# Altium PCB 百味勺子.PcbDoc
Units mil, origin at the board's own origin, x right, y up, seen from the top; angles counter-clockwise.
Board outline 876.26 x 2923.5 mil, 2 copper layers (Top Layer, Bottom Layer); 62 components, 36 nets, 174 pads, 22 vias.
Unrouted connection lines stored in the file: 44.
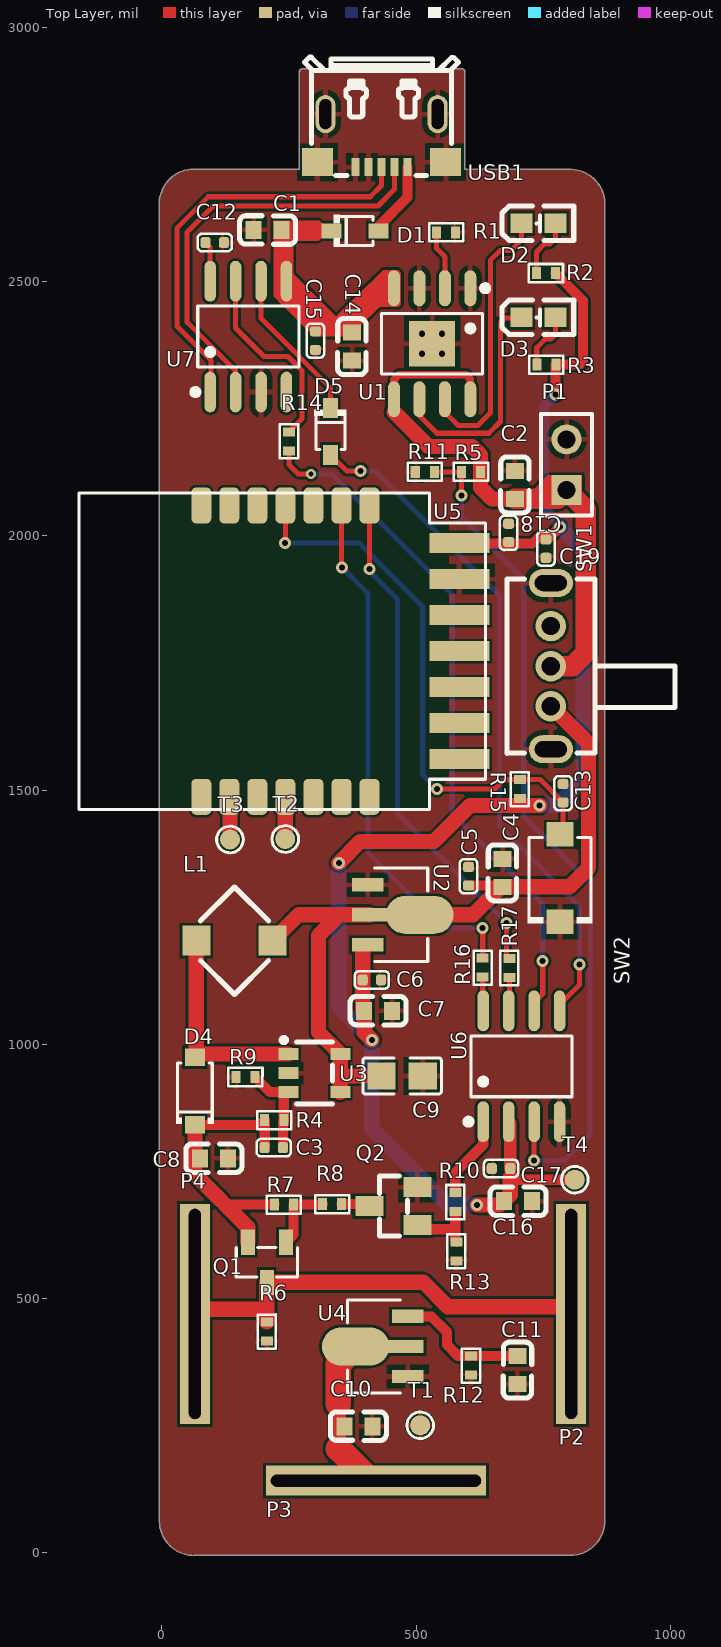
[diagram p0: Top Layer view]
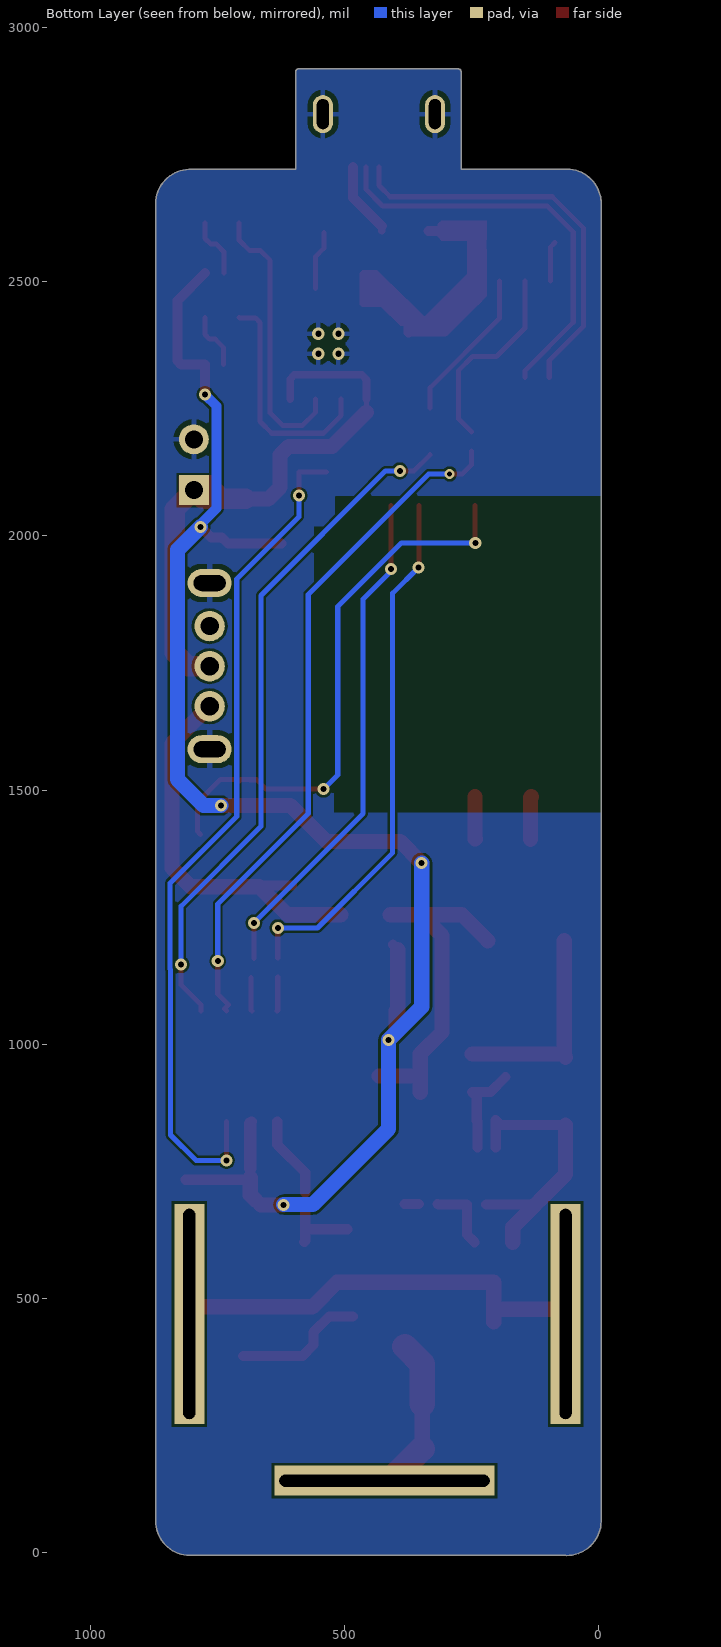
[diagram p1: Bottom Layer view, seen from below]

## Layer stack, top to bottom
Top Solder: solder mask 0.4, Solder Resist, Dk 3.5
Top Layer: signal copper 1.4
Dielectric 1: dielectric 12.6, FR-4, Dk 4.8
Bottom Layer: signal copper 1.4
Bottom Solder: solder mask 0.4, Solder Resist, Dk 3.5

## Board outline
-5.01,61.87 cw(c63.34,63.27) -5.01,61.9 -5.01,61.87 ccw(c63.34,63.27) 63.63,-5.1 ccw(c63.61,-0.08) 64.51,-5.02 802,-5.02 ccw(c802,0) 803,-4.91 ccw(c804,0) 804.1,-5.01 ccw(c802.73,63.34) 871.1,63.34 ccw(c802.73,63.34) 871.1,63.38 ccw(c866.14,64.14) 871.16,64.14 871.16,2654 ccw(c866.14,2654) 871.16,2654.1 ccw(c802.8,2652.73) 805.83,2721.03 ccw(c803.61,2716.54) 803.61,2721.55 595.57,2721.55 595.57,2913.39 ccw(c590.55,2913.39) 590.55,2918.4 275.59,2918.4 ccw(c275.59,2913.39) 270.58,2913.39 270.58,2721.55 67,2721.55 ccw(c67,2716.54) 64.56,2720.92 ccw(c62,2716.61) 61.9,2721.62 ccw(c63.27,2653.27) -4.68,2660.79 ccw(c0,2659) -5.02,2659 -5.02,2656.66 ccw(c63.27,2653.27) -5.1,2652.98 ccw(c-0.08,2653) -5.02,2652.09 -5.02,62 ccw(c0,62)

## Design rules (kind name [scope] priority, off if disabled: settings)
Clearance Polygon [All vs InPolygon] p1: gap=5 ignorepadtopadclearanceinfootprint=FALSE
Clearance [All] p2: gap=5 ignorepadtopadclearanceinfootprint=FALSE except(0: Arc-Hole Track-Hole SMDPad-Hole THPad-Hole Via-Hole Fill-Hole Poly-Hole Region-Hole Text-Hole)
PolygonConnect [All] p1: connectstyle=Relief reliefconductorwidth=10 reliefentries=4 polygonreliefangle="90 Angle" airgapwidth=10
RoutingVias [All] p1: holewidth=10 width=20 viastyle="Through Hole" minholewidth=5 minwidth=10 maxholewidth=40 maxwidth=50
SolderMaskExpansion [All] p1: expansion=4
Width [All] p1: maxlimit=50 minlimit=10 preferedwidth=10 minimp=50.000000 maximp=50.000000 favimp=50.000000
30 further rules are at their usual default settings.

## Components (designator, comment, footprint, x,y, rotation, side; value= is the part's Value field where it differs from the comment)
C1 "106" C0603 208,2602 r180 top value=1uF/16V
C2 "10uF/16V" C0603 694,2100.44 r270 top
C3 "22pF" C0402 220,797 r0 top
C4 "106" C0603 670,1337.44 r90 top
C5 "104" C0402 603,1330.89 r90 top
C6 "106" C0603 425.44,1066 r0 top
C7 "104" C0402 413,1127 r0 top
C8 "1uF" C0603 102.44,776 r0 top
C9 "4.7uF" JMK212BJ475KG-T 322.86,951.58 r180 top
C10 "106" C0603 386.44,249 r0 top
C11 "106" C0603 699,359.44 r270 top
C12 "0.1uF/50V" C0402 104,2577 r0 top
C13 "104/10V" C0402 789,1494.11 r90 top
C14 "10uF/16V" C0603 374,2372.44 r90 top value=1uF/16V
C15 "0.1uF/16V" C0402 302,2384 r90 top value=0.1uF/50V
C16 "22uF/16V" C0603 700.56,692 r180 top value=1uF/16V
C17 "0.1uF/16V" C0402 666.92,756 r0 top value=0.1uF/50V
C18 "104" C0402 682,2006 r90 top
C19 "103" C0402 755.32,1975.11 r270 top
D1 "1N5819WS" 1N5819WS 494.32,2593.41 r0 top
D2 "红色" OSR50603C1E 19154,546 r0 top
D3 "绿色" OSR50603C1E 19154,361 r0 top
D4 "MBR0530" MBR0530 122.1,1004.41 r90 top
D5 "1N5819WS" 1N5819WS 324.74,2091.68 r270 top
L1 "6.8uH" CDRH3D23NP-6R8PC 281.62,1265.28 r45 top
P1 "锂电池" HDR1X2 796,2090 r90 top
P2 "CON1" 焊点1 875,450 r0 top
P3 "CON1" 焊点1 441,212 r90 top
P4 "CON1" 焊点1 135,450 r0 top
Q1 "AO3401A" AO3401A 229.49,652.66 r90 top
Q2 "CJ2312" CJ2312 560.44,657.94 r0 top
R1 "222" R0402 559,2597 r0 top
R2 "102" R0402 755.3,2517 r0 top
R3 "102" R0402 756,2337 r0 top
R4 "1.5M/%1" R0402 221,851 r180 top value=100K/1%
R5 "100K/1%" R0402 608,2126 r0 top
R6 "10K" R0402 206.4,435.3 r270 top value=100K/1%
R7 "103" R0402 240,685 r0 top
R8 "10K" R0402 335,686 r0 top value=100K/1%
R9 "270k/%1" R0402 164.3,936 r0 top value=100K/1%
R10 "103" R0402 577,690 r270 top
R11 "100K/1%" R0402 517,2126 r0 top
R12 "100K/1%" R0402 608,368.3 r90 top
R13 "104" R0402 579,593 r90 top
R14 "100R" R0402 250,2186 r270 top value=200R
R15 "104/1%" R0402 704,1502 r270 top
R16 "100R" R0402 631,1151 r270 top
R17 "100R" R0402 683.49,1150.3 r270 top
SW1 "SK12D07VG4" SK12D07VG4 765,1744 r90 top
SW2 "TS-1088R" TS-1088R-02026 719.32,1247.26 r270 top
T1 "TP" TP1 822.62,148.09 r0 top
T2 "TP" TP1 557.22,1301.09 r0 top
T3 "TP" TP1 448.62,1300.09 r0 top
T4 "TP" TP1 1126.62,631.09 r0 top
U1 "XT2051Y2ASR-G" XT2051Y2ASR-G 461.32,2473.91 r180 top
U2 "MD5333" MD5333 -6916.62,5784.58 r180 top
U3 "TPS61040DBVR" TPS61040DBVR 135.68,933.61 r180 top
U4 "MD5333" MD5333 7804.62,-4123.58 r0 top
U5 "BTU" CBU1 364.59,1489.49 r90 top value=CBU
U6 "STC8G1K08A-36I-SOP8" STC8G1K08A-36I-SOP8 886.98,938 r0 top
U7 "CH340N" CH340N 239.98,2308 r0 top
USB1 "U-F-M5DS-Y-8" U-F-M5DS-Y-8 432.02,2777.34 r180 top

## Footprints (in the part's own frame and the unit in brackets; to place one, negate y for a bottom-side part, rotate by r counter-clockwise, add the part's x,y. Pads: shape width x height; smd on the part's side, far side on the other; paste and mask are expansions set on the pad)
1N5819WS [mm]
  rect 1x0.75 smd: 1(-4.072,0.167) 2(-1.727,0.167)
  silkscreen extent -3.98,-0.64 -2,0.97
AO3401A [mm]
  rect 1.25x0.7 smd: 1(-1.058,-0.364) 2(-1.058,1.536) 3(-3.058,0.586)
  silkscreen extent -2.78,-0.94 -1.33,2.11
C0402 [mm]
  rrect50% 0.508x0.55 smd paste+0 mask+0.051: 1(-0.46,0) 2(0.46,0)
  Top Layer pour cut-out: -0.864,0.458 -0.864,0.152 -0.48,0.152 -0.48,0.457
  Top Layer pour cut-out: -0.864,-0.458 -0.864,-0.152 -0.48,-0.152 -0.48,-0.457
  Top Layer pour cut-out: 0.864,0.458 0.864,0.152 0.48,0.152 0.48,0.457
  Top Layer pour cut-out: -0.152,0.432 0.152,0.432 0.152,-0.432 -0.152,-0.432
  Top Layer pour cut-out: 0.864,-0.458 0.864,-0.152 0.48,-0.152 0.48,-0.457
  silkscreen extent -0.85,-0.43 0.85,0.44, body extent -0.5,-0.25 0.5,0.25, height 0.5
C0603 [mm]
  rect 0.8x0.9 smd: 1(-0.7,0) 2(0.7,0)
  silkscreen extent -1.4,-0.7 1.4,0.72
CBU1 [mm]
  rrect50% 1.8x1 smd paste-1: 1(-0.063,7.291) 2(-0.063,5.891) 3(-0.063,4.491) 4(-0.063,3.091) 5(-0.063,1.691) 6(-0.063,0.291) 7(-0.063,-1.109) 15(14.491,-1.109) 16(14.491,0.291) 17(14.491,1.691) 18(14.491,3.091) 19(14.491,4.491) 20(14.491,5.891) 21(14.491,7.291)
  rect 1x3 smd paste-3: 8(1.814,-5.609) 9(3.614,-5.609) 10(5.414,-5.609) 11(7.214,-5.609) 12(9.014,-5.609) 13(10.814,-5.609) 14(12.614,-5.609)
  silkscreen extent -0.69,-6.91 15.11,13.39
CDRH3D23NP-6R8PC [mm]
  rect 1.5x1.4 smd rot 45: 1(-4.944,2.742) 2(-2.243,0.042)
  silkscreen extent -5.49,-0.51 -1.69,3.29
CH340N [mil]
  oval 22.6x80.14 smd: 1(-144.98,-24.93) 2(-94.98,-24.93) 3(-44.98,-24.93) 4(5.02,-24.93) 5(5.02,193) 6(-44.98,193) 7(-94.98,193) 8(-144.98,193)
  silkscreen extent -180,-31 29,144
CJ2312 [mm]
  rect 1.4x1 smd: 1(-1.472,-0.339) 2(-1.472,1.561) 3(-3.872,0.611)
  silkscreen extent -3.37,-0.89 -1.97,2.11
HDR1X2 [mm] "Connector; Header; 2 Position"
  rect 1.5x1.5 hole 0.9: 1(0,0)
  round 1.5 hole 0.9: 2(2.54,0)
  silkscreen extent -1.27,-1.27 3.81,1.27
JMK212BJ475KG-T [mm]
  rect 1.41x1.35 smd: 1(-4.832,0.345) 2(-2.772,0.345)
  silkscreen extent -5.77,-0.56 -1.84,1.25
MBR0530 [mm]
  rect 0.88x0.99 smd: 1(-4.132,1.45) 2(-0.747,1.45)
  silkscreen extent -4.07,0.51 -1.03,2.39
MD5333 [mm]
  rect 1.575x0.672 smd: 1(-185.956,113.551) 3(-185.956,116.551)
  oval 3.372x1.898 smd: 2(-188.56,115.051)
  rect 1.833x0.672 smd: 2(-186.086,115.051)
  silkscreen extent -188.96,112.73 -186.31,117.38
OSR50603C1E [mil]
  rect 43x39 smd: 1(-18380,2069) 2(-18447,2069)
  silkscreen extent -18485,2035 -18344,2103
R0402 [mm]
  rect 0.45x0.6 smd paste+0 mask+0.051: 1(-0.475,0) 2(0.475,0)
  Top Layer pour cut-out: -0.189,-0.453 -0.189,0.452 0.19,0.452 0.19,-0.453
  Top Layer pour cut-out: 0.889,0.178 0.889,0.483 0.509,0.483 0.509,0.178
  Top Layer pour cut-out: 0.889,-0.178 0.889,-0.483 0.509,-0.483 0.509,-0.178
  Top Layer pour cut-out: -0.889,0.178 -0.889,0.483 -0.509,0.483 -0.509,0.178
  Top Layer pour cut-out: -0.889,-0.178 -0.889,-0.483 -0.509,-0.483 -0.509,-0.178
  silkscreen extent -0.85,-0.45 0.85,0.45, body extent -0.5,-0.25 0.5,0.25, height 0.35
SK12D07VG4 [mil]
  round 60 hole 36: 1(-78.74,0) 2(0,0) 3(78.74,0)
  oval 55.12x86.61 hole 31.5 slot 62.99 at 90 deg: 4(163.38,0) 5(-163.39,0)
  silkscreen extent -171,-244 171,87
STC8G1K08A-36I-SOP8 [mil]
  oval 22.6x80.14 smd: 1(-254.98,-89.93) 2(-204.98,-89.93) 3(-154.98,-89.93) 4(-104.98,-89.93) 5(-104.98,128) 6(-154.98,128) 7(-204.98,128) 8(-254.98,128)
  silkscreen extent -290,-96 -81,79
TP1 [mm]
  round 1 smd: 1(-7.991,2.614)
  silkscreen extent -8.65,1.95 -7.33,3.28
TPS61040DBVR [mm]
  rect 1x0.6 smd: 1(-2.869,-1.204) 2(-2.869,-0.254) 3(-2.869,0.696) 4(-5.469,0.696) 5(-5.469,-1.204)
  silkscreen extent -5.07,-2.03 -2.52,1.3
TS-1088R-02026 [mm]
  rect 1.23x1.36 smd: 1(-4.211,1.617) 2(0.159,1.617)
  silkscreen extent -4.05,0 0.23,3.23
U-F-M5DS-Y-8 [mm]
  rect 0.4x0.9 smd: 1(-1.3,1.326) 2(-0.65,1.326) 3(0,1.326) 4(0.65,1.326) 5(1.3,1.326)
  rect 1.54x1.4 smd: 6(3.2,1.076) 7(-3.2,1.075)
  oval 1x1.9 hole 0.6 slot 1.5 at 90 deg: 8(-2.8,-1.326) 9(2.8,-1.326)
  silkscreen extent -3.85,-4.17 3.85,1.74
XT2051Y2ASR-G [mm]
  oval 0.6x1.8 smd: 1(-3.687,-0.336) 2(-2.417,-0.336) 3(-1.147,-0.336) 4(0.123,-0.336) 5(0.123,5.209) 6(-1.147,5.209) 7(-2.417,5.209) 8(-3.687,5.209)
  rect 2.29x2.29 smd: 9(-1.782,2.436)
  silkscreen extent -4.58,-0.49 0.74,3.96
焊点1 [mm]
  rect 1.5x11 hole 0.6 slot 10.5 at 90 deg: 1(-1.778,0.508)

## Part data
C1 C14 C16: library part 1.02.03.00181, "无极性电容", ALT_SYMBOLS=#N/A, ComponentLink2Description=三星MLCC.pdf, ComponentLink2URL=file:///\\172.16.246.8\lib-ad\DBlib\Datasheet\电容类资料\三星MLCC.pdf, Orcad Footprint=#N/A, Orcad Footprint Path=#N/A, Orcad Library=#N/A, Orcad Library Path=#N/A, Part Number=1.02.03.00181, 修改人=system, 制造商=三星(SAMSUNG), 制造商型号=CL10B105KO8NNNC, 器件高度=null, 安装方式=贴片, 工作温度=null, 更新时间="2021-03-25 10:51:02", 物料描述=瓷介电容;贴片;X7R;1UF;±10%;16V;0603, 物料状态=已发布, 物料生产状态=量产, 物料类目=瓷介电容, 物料通用性等级=高, 管脚数量=2
C2: "无极性电容", Part Number=1.02.05.00869
C3 C4 C5 C6 C7 C8 C10 C11 C13 C18 C19: library part 1.02.05.00869, "无极性电容", Part Number=1.02.05.00869
C9: BOM_Manufacturer="TAIYO YUDEN", BOM_Manufacturer Part=JMK212BJ475KG-T, BOM_Supplier=LCSC, BOM_Supplier Part=C92788, nameAlias=Capacitance, spicePre=C, spiceSymbolName=JMK212BJ475KG-T
C12 C15 C17: library part 1.02.05.00834, "无极性电容", ALT_SYMBOLS=c0603,c0603a, ComponentLink2Description=null, ComponentLink2URL=null, Orcad Footprint=c0603,c0603a, Orcad Footprint Path=Z:\tuya_lib\footprint, Orcad Library=C, Orcad Library Path=Z:\tuya_lib\sch-lib\DISCRETE.OLB, Part Number=1.02.05.00834, 修改人=system, 制造商=华科, 制造商型号=0603B104K500CT, 器件高度=null, 安装方式=贴片, 工作温度=null, 更新时间="2021-03-25 10:51:02", 物料描述=瓷介电容;贴片;X7R;0.1UF;±10%;50V;0603, 物料状态=已发布, 物料生产状态=量产, 物料类目=瓷介电容, 物料通用性等级=高, 管脚数量=2
D1 D5: library part 1N5819WS_C1884554, BOM_JLCPCB Part Class="Extended Part", BOM_Manufacturer=YFW佑风微, BOM_Manufacturer Part=1N5819WS, BOM_Supplier=LCSC, BOM_Supplier Part=C1884554, Contributor=LCSC, spicePre=D, spiceSymbolName=1N5819WS_C1884554
D2 D3: "LED", Part Number=1.06.02.00452
D4: library part MBR0530_C475718, BOM_JLCPCB Part Class="Extended Part", BOM_Manufacturer=Shikues, BOM_Manufacturer Part=MBR0530, BOM_Supplier=LCSC, BOM_Supplier Part=C475718, Contributor=LCSC, spicePre=D, spiceSymbolName=MBR0530_C475718
L1: BOM_Manufacturer=Sumida, BOM_Manufacturer Part=CDRH3D23NP-6R8PC, BOM_Supplier=LCSC, BOM_Supplier Part=C323532, Contributor=LCSC, nameAlias=Inductance, spicePre=L, spiceSymbolName=CDRH3D23NP-6R8PC
P1: library part "Header 2", "Header, 2-Pin", LatestRevisionDate=17-Jul-2002, LatestRevisionNote="Re-released for DXP Platform.", Publisher="Altium Limited"
Q1: library part AO3401A_C700954, BOM_JLCPCB Part Class="Extended Part", BOM_Manufacturer=HUASHUO(华朔), BOM_Manufacturer Part=AO3401A, BOM_Supplier=LCSC, BOM_Supplier Part=C700954, Contributor=LCSC, spicePre=Q, spiceSymbolName=AO3401A_C700954
Q2: library part 1.06.11.00008, "N-Channel MOSFET", ComponentLink2Description=CJ2312.pdf, ComponentLink2URL=file:///\\172.16.246.8\lib-ad\DBlib\Datasheet\三极管资料\CJ2312.pdf, Orcad Footprint=sot23-3, Orcad Footprint Path=Z:\tuya_lib\footprint, Orcad Library=FETN_GSD, Orcad Library Path=?Z:\tuya_lib\sch-lib\DISCRETE.OLB, Part Number=1.06.11.00008, 修改人=system, 制造商=江苏长电, 制造商型号=CJ2312, 器件高度=1.15mm, 安装方式=贴片, 工作温度=null, 更新时间="2021-03-25 10:51:02", 物料描述=场效应管;N沟道;CJ2312;20V;5A;31.8MR/4.5V;SOT-23;贴片, 物料状态=已发布, 物料生产状态=量产, 物料类目=场效应管, 物料通用性等级=高, 管脚数量=3
R1 R14 R15 R16 R17: library part 1.01.01.00808, "电阻", Part Number=1.01.01.00808
  R14: ALT_SYMBOLS=r0603, ComponentLink2Description=厚生电阻规格书.pdf, ComponentLink2URL=file:///\\172.16.246.8\lib-ad\DBlib\Datasheet\电阻类\厚生电阻规格书.pdf, Orcad Footprint=r0603, Orcad Footprint Path=Z:\tuya_lib\footprint, Orcad Library=R, Orcad Library Path=Z:\tuya_lib\sch-lib\DISCRETE.OLB, 修改人=system, 制造商=厚声(UniOhm), 制造商型号=0603WAJ0201***, 器件高度=null, 安装方式=贴片, 工作温度=null, 更新时间="2021-03-25 10:51:02", 物料描述=普通电阻;200R;±5%;0603;1/10W;贴片;, 物料状态=已发布, 物料生产状态=量产, 物料类目=普通电阻, 物料通用性等级=中, 管脚数量=2
R2 R3 R7 R10 R13: library part RES-1, "RES"
R4 R6 R8 R9: library part 100K/1%, "电阻"
R5 R11 R12: "电阻"
SW1: BOM_JLCPCB Part Class="Extended Part", BOM_Manufacturer="SHOU HAN", BOM_Manufacturer Part=SK12D07VG4, BOM_Supplier=LCSC, BOM_Supplier Part=C393937, Contributor=LCSC, spicePre=S, spiceSymbolName=SK12D07VG4
SW2: library part TS-1088R-02026, BOM_Manufacturer=XUNPU, BOM_Manufacturer Part=TS-1088R-02026, BOM_Paste Type=expand, BOM_Supplier=LCSC, BOM_Supplier Part=C455280, Contributor=LCSC, spicePre=S, spiceSymbolName=TS-1088R-02026
U1: BOM_Manufacturer=NATLINEAR, BOM_Manufacturer Part=XT2051Y2ASR-G, BOM_Supplier=LCSC, BOM_Supplier Part=C236398, Contributor=LCSC, spicePre=U, spiceSymbolName=XT2051Y2ASR-G
U2 U4: BOM_JLCPCB Part Class="Extended Part", BOM_Manufacturer=明达微, BOM_Manufacturer Part=MD5333, BOM_Supplier=LCSC, BOM_Supplier Part=C2827936, Contributor=LCSC, spicePre=U, spiceSymbolName=MD5333
U3: BOM_JLCPCB Part Class="Basic Part", BOM_Manufacturer=TI, BOM_Manufacturer Part=TPS61040DBVR, BOM_Supplier=LCSC, BOM_Supplier Part=C7722, spicePre=U, spiceSymbolName=TPS61040DBVR
U5: Part Number=0110, Component Type=Standard, Pin Count=21, Process=贴片, 制造商=Ϳѻ, 制造商型号=CBU, 描述=CBU
U6: BOM_JLCPCB Part Class="Extended Part", BOM_Manufacturer="STC Micro", BOM_Manufacturer Part=STC8G1K08A-36I-SOP8, BOM_Supplier=LCSC, BOM_Supplier Part=C915663, Contributor=LCSC, spicePre=U, spiceSymbolName=STC8G1K08A-36I-SOP8
U7: BOM_Manufacturer="WCH(Jiangsu Qin Heng)", BOM_Manufacturer Part=CH340N, BOM_Paste Type=expand, BOM_Supplier=LCSC, BOM_Supplier Part=C506813, Contributor=LCSC, spicePre=U, spiceSymbolName=CH340N
USB1: BOM_Manufacturer="Korean Hroparts Elec", BOM_Manufacturer Part=U-F-M5DS-Y-8, BOM_Supplier=LCSC, BOM_Supplier Part=C961761, Contributor=LCSC, spicePre=U, spiceSymbolName=U-F-M5DS-Y-8

## Via types
v1: diameter 23.62, hole 11.81, Top Layer to Bottom Layer, 17 vias
v2: diameter 24, hole 12, Top Layer to Bottom Layer, 4 vias
v3: diameter 20, hole 10, Top Layer to Bottom Layer, 1 vias

## Nets (pads, with @x,y where several pads share a name; then routed paths per layer and width w, separated by ;. In a path a pad name is that pad's centre, name@x,y a point inside that pad or via, vN(x,y) a via of type N, cw(c..) or ccw(c..) an arc to the next point about the centre after c; other vN are vias at no path point)
3V3: C6.1 C7.1 C16.2 C17.2 C18.1 C19.1 R2.2 R3.2 R15.2 T4.1 U2.3 U5.14 U6.2 | length 3196.2
  Top Layer w20: C6.1@394.89,1066 C6.1 ; U2.3@394.89,1186.33 U2.3 ; U5.14@623.98,1985 729,1985 741,1997 762,1997 v1(783,2018) ; C16.2@665,684 C16.2 ; U6.2 U6.2@685,845.07 ; C17.2 685,738 689,734 T4.1 ; v1(774,2278) 774,2336.3 R3.2 821,2337 828,2344 828,2463 R2.2
  Top Layer w25: C17.2 U6.2@685,845.07
  Top Layer w30: v1(348,1357) 390,1399 535.02,1399 606.02,1470 v1(743,1470) ; C6.1@394.89,1066 C7.1 U2.3@394.89,1186.33 ; C6.1 397.89,1024.11 v1(413,1009) ; v1(620,684) C16.2@665,684 ; C16.2 685,704 685,738
  Bottom Layer w20: v1@619,685 v1(620,684) ; v1(774,2278) 751.47,2255.47 751.47,2054.26 783,2022.73 v1(783,2018)
  Bottom Layer w30: v1(348,1357) 348,1074 v1(413,1009) 413,834 562,685 v1@619,685 ; v1(743,1470) 777,1470 828.31,1521.31 828.31,1972.69 v1(783,2018)
ADC: R5.1 R11.2 U6.3 | length 1669.7
  Top Layer w10: R11.2 R5.1 v1(589.3,2079.3) ; v1(732,772) U6.3
  Bottom Layer w10: v1(589.3,2079.3) 589.3,2037.7 711.69,1915.31 711.69,1448.31 842.81,1317.19 842.81,1147.97 842,1147.15 842,822 792,772 v1(732,772)
BTU_RXD1: R16.1 U5.16 | length 1051.1
  Top Layer w10: U5.16 353.12,1939.14 v1(354.26,1938) ; R16.1 v1(631,1229)
  Bottom Layer w10: v1(354.26,1938) 405,1887.26 405,1377 553,1229 v1(631,1229)
BTU_TXD1: R17.1 U5.15 | length 1007
  Top Layer w10: v1@408.24,1930.76 v1(408.24,1935) U5.15 ; R17.1@678,1169 v1(678,1239)
  Bottom Layer w10: v1(408.24,1935) 408.24,1930.76 463,1876 463,1454 v1(678,1239)
D+: U7.1 USB1.3 | length 794.3
  Top Layer w10: U7.1@97,2312 97,2345 30,2412 30,2606 91,2667 410,2667 432.02,2689.02 USB1.3
D-: U7.2 USB1.2 | length 811.3
  Top Layer w10: U7.2@145,2312 145,2325 49.8,2420.2 49.8,2597.8 101,2649 425,2649 457.61,2681.61 USB1.2
GND: C1.2 C2.1 C4.2 C5.2 C6.2 C7.2 C8.2 C9.1 C10.2 C11.2 C12.2 C13.2 C14.1 C15.1 C16.1 C17.1 C18.2 C19.2 P1.2 Q2.2 R1.2 R6.2 R9.1 R11.1 R12.1 R13.1 SW1.4 SW1.5 SW2.2 T1.1 U1.1 U1.3 U1.9 U2.1 U3.2 U4.1 U5.13 U6.4 U7.3 USB1.4 USB1.5 USB1.6 USB1.7 USB1.8 USB1.9
  other v2: 511.8,2358.32 551.17,2358.32 511.8,2397.69 551.17,2397.69
LED1: D3.2 U1.6 | length 455.8
  Top Layer w10: U1.6 506.49,2236.51 541,2202 643,2202 666,2225 666,2420 675,2429 706,2429 D3.2
LED2: D2.2 U1.7 | length 546.8
  Top Layer w10: U1.7 556.49,2243.51 583,2217 621,2217 646,2242 646,2542.01 664.99,2561 686,2561 707,2582 D2.2
NetC3_2: C3.2 R4.1 R9.2 U3.3 | length 191.5
  Top Layer w20: R9.2 212.79,906.21 U3.3 239.7,897.27 R4.1 238.11,849.41 C3.2
NetC10_1: C10.1 P3.1 U4.2 | length 315.2
  Top Layer w30: 347,205 347,229 347,292
  Top Layer w50: 347,205 410,142 P3.1 ; 347,292 347,372 U4.2@381,406
NetC11_1: C11.1 R12.2 U4.3 | length 262.6
  Top Layer w20: U4.3 529.95,465.05 561,434 561,408.79 582.79,387 R12.2 C11.1
NetC12_1: C12.1 U7.8 | length 79.8
  Top Layer w10: C12.1 95,2567.89 U7.8
NetD1_2: D1.2 USB1.1 | length 148.7
  Top Layer w15: D1.2 D1.2@426.33,2609.33
  Top Layer w20: D1.2@426.33,2609.33 483.2,2666.2 USB1.1
NetD2_1: D2.1 R2.1 | length 119.9
  Top Layer w10: R2.1 736.6,2558.6 752,2574 763,2574 774,2585 D2.1
NetD3_1: D3.1 R3.1 | length 114.6
  Top Layer w10: R3.1 737.3,2370.3 754,2387 765,2387 774,2396 D3.1
NetD4_2: D4.2 L1.1 U3.1 | length 412.5
  Top Layer w30: D4.2 D4.2@67.66,977.66 ; L1.1 D4.2@67.66,977.66 ; U3.1 71.01,981.01 D4.2@67.66,977.66
NetD5_1: D5.1 U7.6 | length 305.5
  Top Layer w10: U7.6 195,2428 331.33,2291.67 D5.1
NetQ1_1: Q1.1 R7.2 R8.1 | length 138.2
  Top Layer w20: Q1.1 258.7,625.9 R7.2 315.3,685 R8.1
NetQ2_1: Q2.1 R10.2 R13.2 | length 145.8
  Top Layer w20: Q2.1@494.05,636.65 571.15,636.65 577,642.5 ; R10.2 577,642.5 ; R13.2 577,613.7 577,642.5
NetQ2_3: Q2.3 R8.2 | length 28.3
  Top Layer w20: R8.2 Q2.3@382,686
NetR1_1: R1.1 U1.2 | length 116.6
  Top Layer w10: R1.1 540.3,2565.7 556.49,2549.51 U1.2
NetR14_1: R14.1 U7.7 | length 388.3
  Top Layer w10: U7.7 145,2409 201,2353 248,2353 275.3,2325.7 275.3,2230 R14.1
P5.4: R10.1 U6.1 | length 162.1
  Top Layer w20: R10.1 577,748 632,803 U6.1
PD7: T3.1 U5.2 | length 84.6
  Top Layer w30: U5.2 134,1485.65 T3.1
RESETB: C13.1 R15.1 SW2.1 U5.18 | length 1105.7
  Top Layer w10: v1(242.6,1986.09) 242.88,1986.38 U5.18 ; v1(541,1502) 654,1502 672.56,1520.56 685.75,1520.56 685.61,1520.7 R15.1 ; R15.1@706.35,1518.35 709,1521 744,1521 C13.1 789,1419.05 SW2.1
  Bottom Layer w10: v1(242.6,1986.09) 387.99,1986.09 513,1861.08 513,1530 v1(541,1502)
RXD: D5.2 U6.5 | length 1345.4
  Top Layer w10: D5.2 363,2128 v1(391,2128) ; U6.5 782,1078 821,1117 v1(821,1157)
  Bottom Layer w10: v1(391,2128) 418.97,2128 664,1882.97 664,1429 821,1272 v1(821,1157)
RXD1: R17.2 U6.7 | length 66.2
  Top Layer w10: U6.7 683.49,1067.49 R17.2
SWS: T2.1 U5.4 | length 83.1
  Top Layer w30: T2.1 242.88,1404.28 U5.4
TXD: R14.2 U6.6 | length 1360.3
  Top Layer w10: R14.2 250,2140 268,2122 v3(293,2122) ; U6.6 736,1070 728,1078 749,1099 v1(749,1164)
  Bottom Layer w10: v3(293,2122) 334,2122 571,1885 571,1454 749,1276 v1(749,1164)
TXD1: R16.2 U6.8 | length 66.7
  Top Layer w10: R16.2 631,1067 U6.8
USB_5V: C1.1 C14.2 C15.2 D1.1 U1.4 U7.5 | length 547.6
  Top Layer w20: C1.1@233,2603 236,2603 239,2600 D1.1 ; C1.1@236,2600 245,2591 U7.5 245,2459.11 C15.2 371.89,2402.11 C14.2 374,2449 412.15,2487.15 U1.4
V_OUT: P2.1 P4.1 Q1.3 R6.1 | length 847.8
  Top Layer w30: P4.1 74,479 206.4,479 ; R6.1 206.4,479 ; P2.1 791,484 562.53,484 514.26,532.26 Q1.3 206.4,479
VBAT: C2.2 P1.1 R5.2 SW1.2 U1.5 U1.8 | length 1130
  Top Layer w10: U1.5@456.49,2243.51 U1.5 ; P1.1@778.89,2072.89 P1.1
  Top Layer w15: U1.5 456.49,2307.49 465.78,2316.78 516.56,2316.78 598.22,2316.78 606.49,2308.51 U1.8
  Top Layer w30: U1.5@456.49,2243.51 524,2176 610,2176 626.7,2159.3 R5.2 626.7,2095.29 649.1,2072.89 C2.2
  Top Layer w40: C2.2 P1.1@778.89,2072.89 ; SW1.2 807,1744 833.31,1770.31 833.31,2052.69 P1.1
VBAT_BOOST_8V: C3.1 C8.1 D4.1 Q1.2 R4.2 R7.1 | length 566.3
  Top Layer w20: D4.1 193.03,841.73 R4.2 202.3,797.41 C3.1 ; 117.17,692.17 124.35,685 R7.1
  Top Layer w30: D4.1 65,744 102.46,706.54 102.81,706.54 117.17,692.17 ; 124.35,685 169,640.35 Q1.2
VBAT_OUT: C4.1 C5.1 C9.2 L1.2 SW1.1 U2.2 U3.4 U3.5 | length 1466.9
  Top Layer w20: C5.1 667.11,1312.78 C4.1
  Top Layer w30: L1.2 269,1255 349,1255 ; U3.4 351,944 ; U2.2@409.59,1255 349,1255 ; C9.2 357,938 351,944 ; U2.2@507,1255 612.01,1255 666.9,1309.89 C4.1 801.89,1309.89 838.81,1346.81 838.81,1591.45 SW1.1 ; 349,1255 308,1214 308,1024 U3.5 351,944
pads on no net: SW1.3 U5.1 U5.3 U5.5 U5.6 U5.7 U5.8 U5.9 U5.10 U5.11 U5.12 U5.17 U5.19 U5.20 U5.21 U7.4

## Polygon pours and split planes (outlines as drawn)
GND on Top Layer "GND_L01_P002" (solid, remove dead copper, pour order 2): -5.01,61.87 cw(c63.44,63.34) -5.01,61.9 -5.01,61.87 ccw(c63.34,63.27) 63.63,-5.1 ccw(c63.61,-0.08) 64.51,-5.02 802,-5.02 ccw(c802,0) 803,-4.91 ccw(c804,0) 804.1,-5.01 ccw(c802.73,63.34) 871.1,63.34 ccw(c802.77,63.36) 871.1,63.38 ccw(c866.14,64.14) 871.16,64.14 871.16,2654 ccw(c866.14,2654) 871.16,2654.1 ccw(c802.8,2652.73) 805.83,2721.03 ccw(c803.61,2716.54) 803.61,2721.55 595.57,2721.55 595.57,2913.39 ccw(c590.55,2913.39) 590.55,2918.4 275.59,2918.4 ccw(c275.59,2913.39) 270.58,2913.39 270.58,2721.55 67,2721.55 ccw(c67,2716.54) 64.56,2720.92 ccw(c62,2716.61) 61.9,2721.62 ccw(c63.27,2653.27) -4.68,2660.79 ccw(c0,2659) -5.02,2659 -5.02,2656.66 ccw(c63.27,2653.27) -5.1,2652.98 ccw(c-0.08,2653) -5.02,2652.09 -5.02,62 ccw(c0,62)
GND on Bottom Layer "GND_L02_P003" (solid, remove dead copper, pour order 3): -5.01,61.87 cw(c63.44,63.34) -5.01,61.9 -5.01,61.87 ccw(c63.34,63.27) 63.63,-5.1 ccw(c63.61,-0.08) 64.51,-5.02 802,-5.02 ccw(c802,0) 803,-4.91 ccw(c804,0) 804.1,-5.01 ccw(c802.73,63.34) 871.1,63.34 ccw(c802.77,63.36) 871.1,63.38 ccw(c866.14,64.14) 871.16,64.14 871.16,2654 ccw(c866.14,2654) 871.16,2654.1 ccw(c802.8,2652.73) 805.83,2721.03 ccw(c803.61,2716.54) 803.61,2721.55 595.57,2721.55 595.57,2913.39 ccw(c590.55,2913.39) 590.55,2918.4 275.59,2918.4 ccw(c275.59,2913.39) 270.58,2913.39 270.58,2721.55 67,2721.55 ccw(c67,2716.54) 64.56,2720.92 ccw(c62,2716.61) 61.9,2721.62 ccw(c63.27,2653.27) -4.68,2660.79 ccw(c0,2659) -5.02,2659 -5.02,2656.66 ccw(c63.27,2653.27) -5.1,2652.98 ccw(c-0.08,2653) -5.02,2652.09 -5.02,62 ccw(c0,62)

## Other copper
Top Layer:
  pour cut-out: -6,2083.51 521.85,2083.51 523.85,2081.51 523.85,2023.51 565,2023.51 565,1518.51 524.88,1518.51 525.68,1517.71 525.68,1459.71 -3.51,1459.71 -6,1462.2 -6,2081.51
  region net VBAT: 732,2092 758.98,2118.98 824.02,2118.98 826,2117 826,2060 733,2060 732,2061
  region net USB_5V: 375.5,2464.5 331,2420 331,2410.45 372.95,2410.45 375.5,2413
  region net USB_5V: 258,2538 258,2516 361,2413 358.45,2410.45 303.55,2410.45 257,2457 257,2528
  region: 353,2500
  region net USB_5V: 435,2523 465,2523 470,2518 470,2455 465,2450 464,2451 428,2451 390,2413 361,2413 361,2417 364,2420 364,2452
  region net USB_5V: 220,2471 237,2454 239,2456 258,2456 258,2620 221,2620 221,2565 220,2564
  region net USB_5V: 315,2614.81 309.81,2620 221,2620 220,2621 220,2582 221,2581 309,2581 316,2588 316,2614
  region: 137,2289
  region: 151.58,2291
  region: 501,2702
Bottom Layer:
  pour cut-out: -11,2079.54 516.85,2079.54 518.85,2077.54 518.85,2019.54 560,2019.54 560,1514.54 519.88,1514.54 520.68,1513.73 520.68,1455.74 -8.51,1455.74 -11,1458.22 -11,2077.54

## Silkscreen, mask and mechanical layers (free items; w line width, h text height)
Mechanical 1:
  pour cut-out: -3,2073
  lines w10: -0.08,2653 cw(c63.27,2653.27) 62,2716.61 ; 63.61,-0.08 cw(c63.34,63.27) 0,62 0,2659 ; 63.61,0 802,0 ; 802.53,2716.08 cw(c802.8,2652.73) 866.14,2654 866.14,64.14 ; 803.61,2716.54 590.55,2716.54 590.55,2913.39 275.59,2913.39 275.59,2716.54 67,2716.54 ; 804,0 ccw(c802.73,63.34) 866.08,63.61 ; 0,2659 0,2659 ; 67,2716.54 67,2716.54